# Altium PCB team back ECU.PcbDoc
Units mil, origin at the board's own origin, x right, y up, seen from the top; angles counter-clockwise.
Board outline 2737.01 x 2749.61 mil, 2 copper layers (Top, Bottom); 12 components, 18 nets, 110 pads, 0 vias.
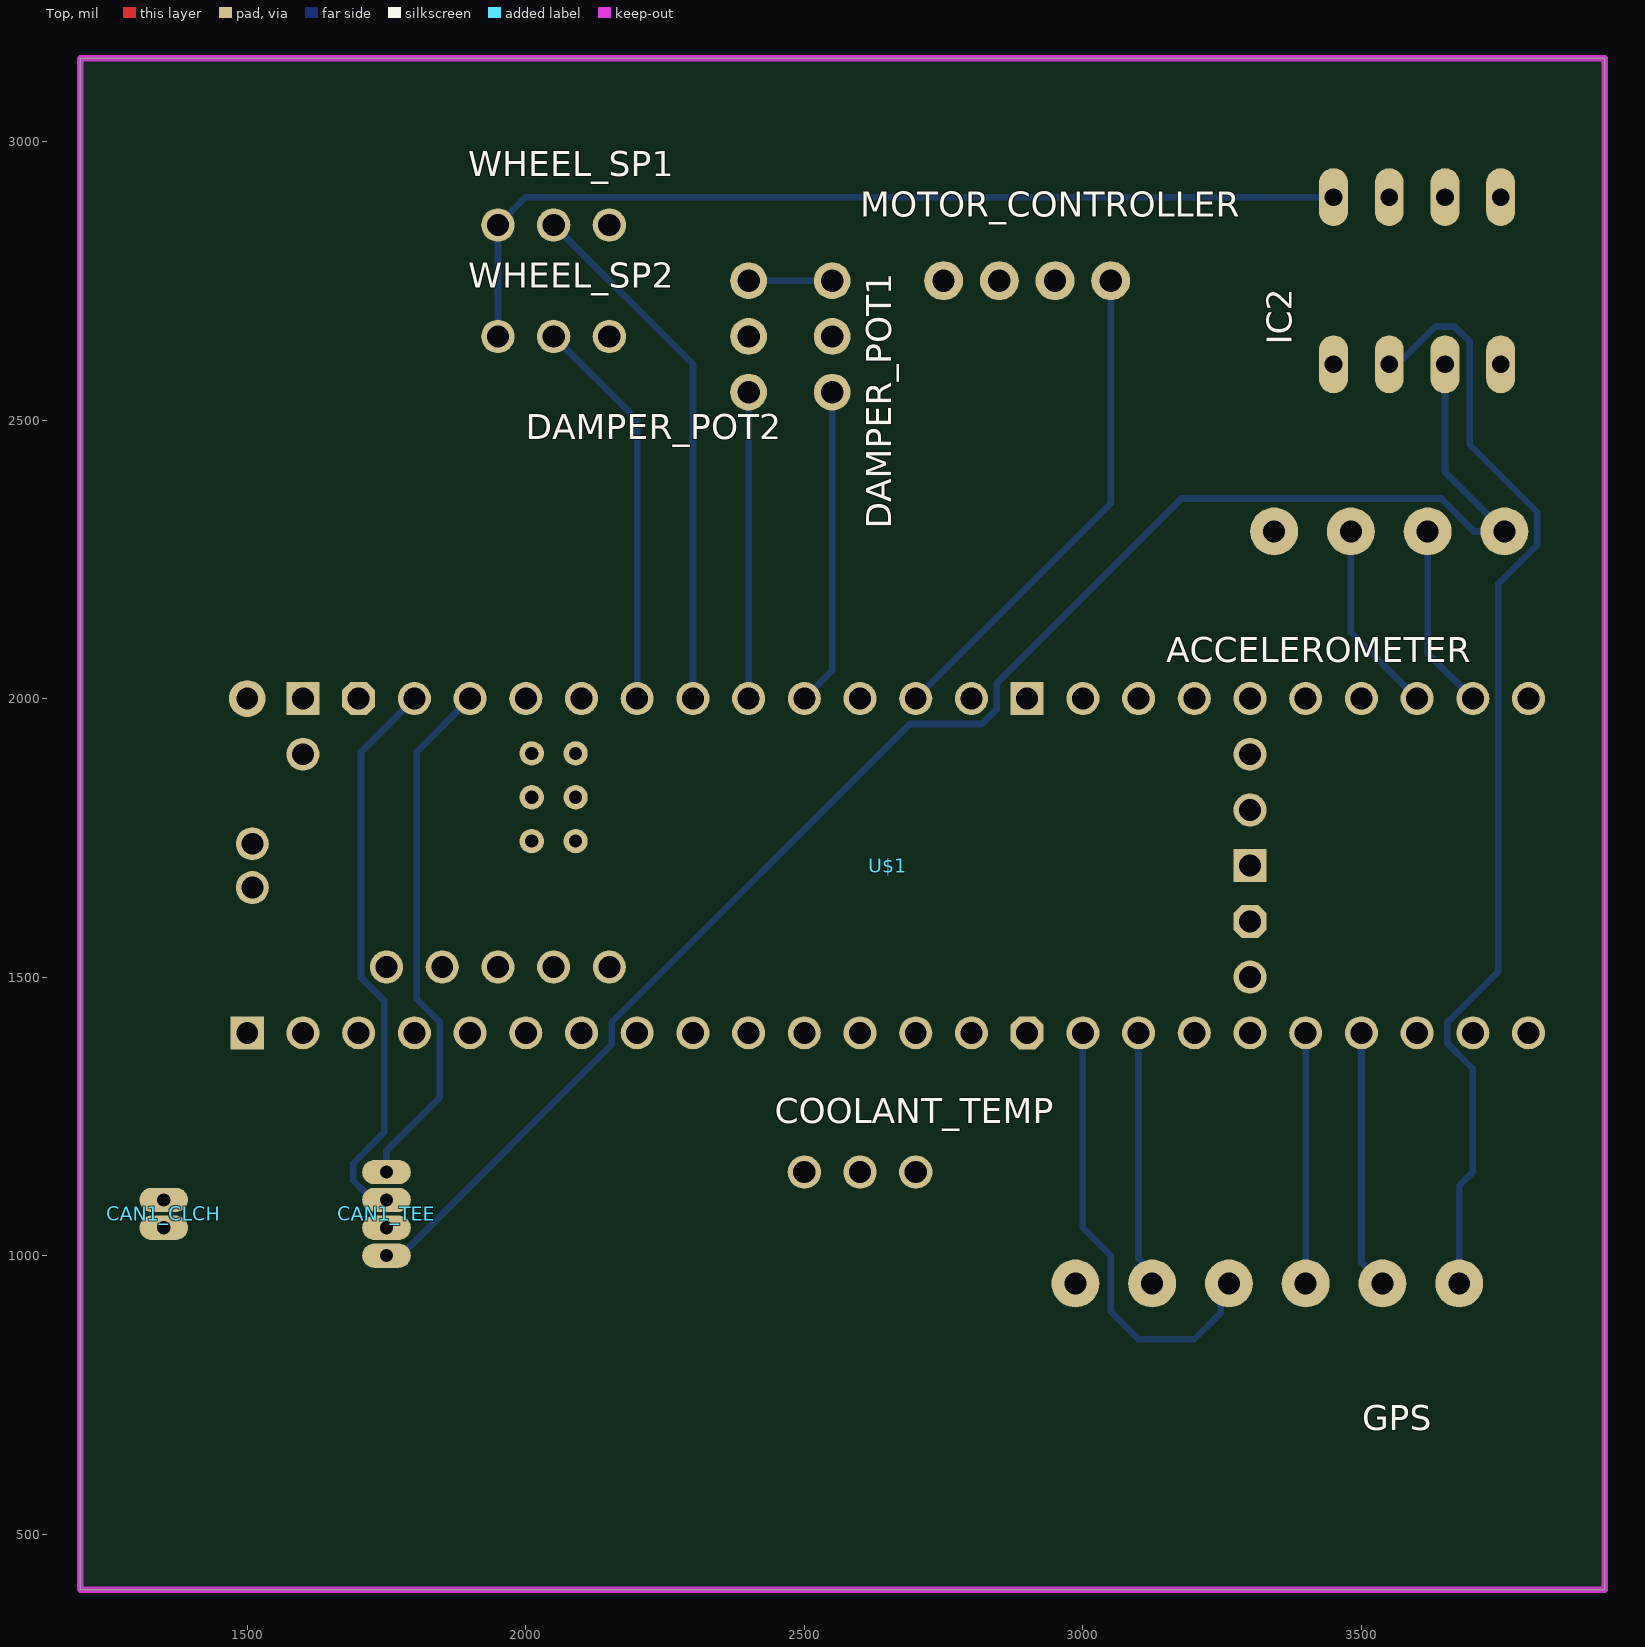
[diagram p0: Top view]
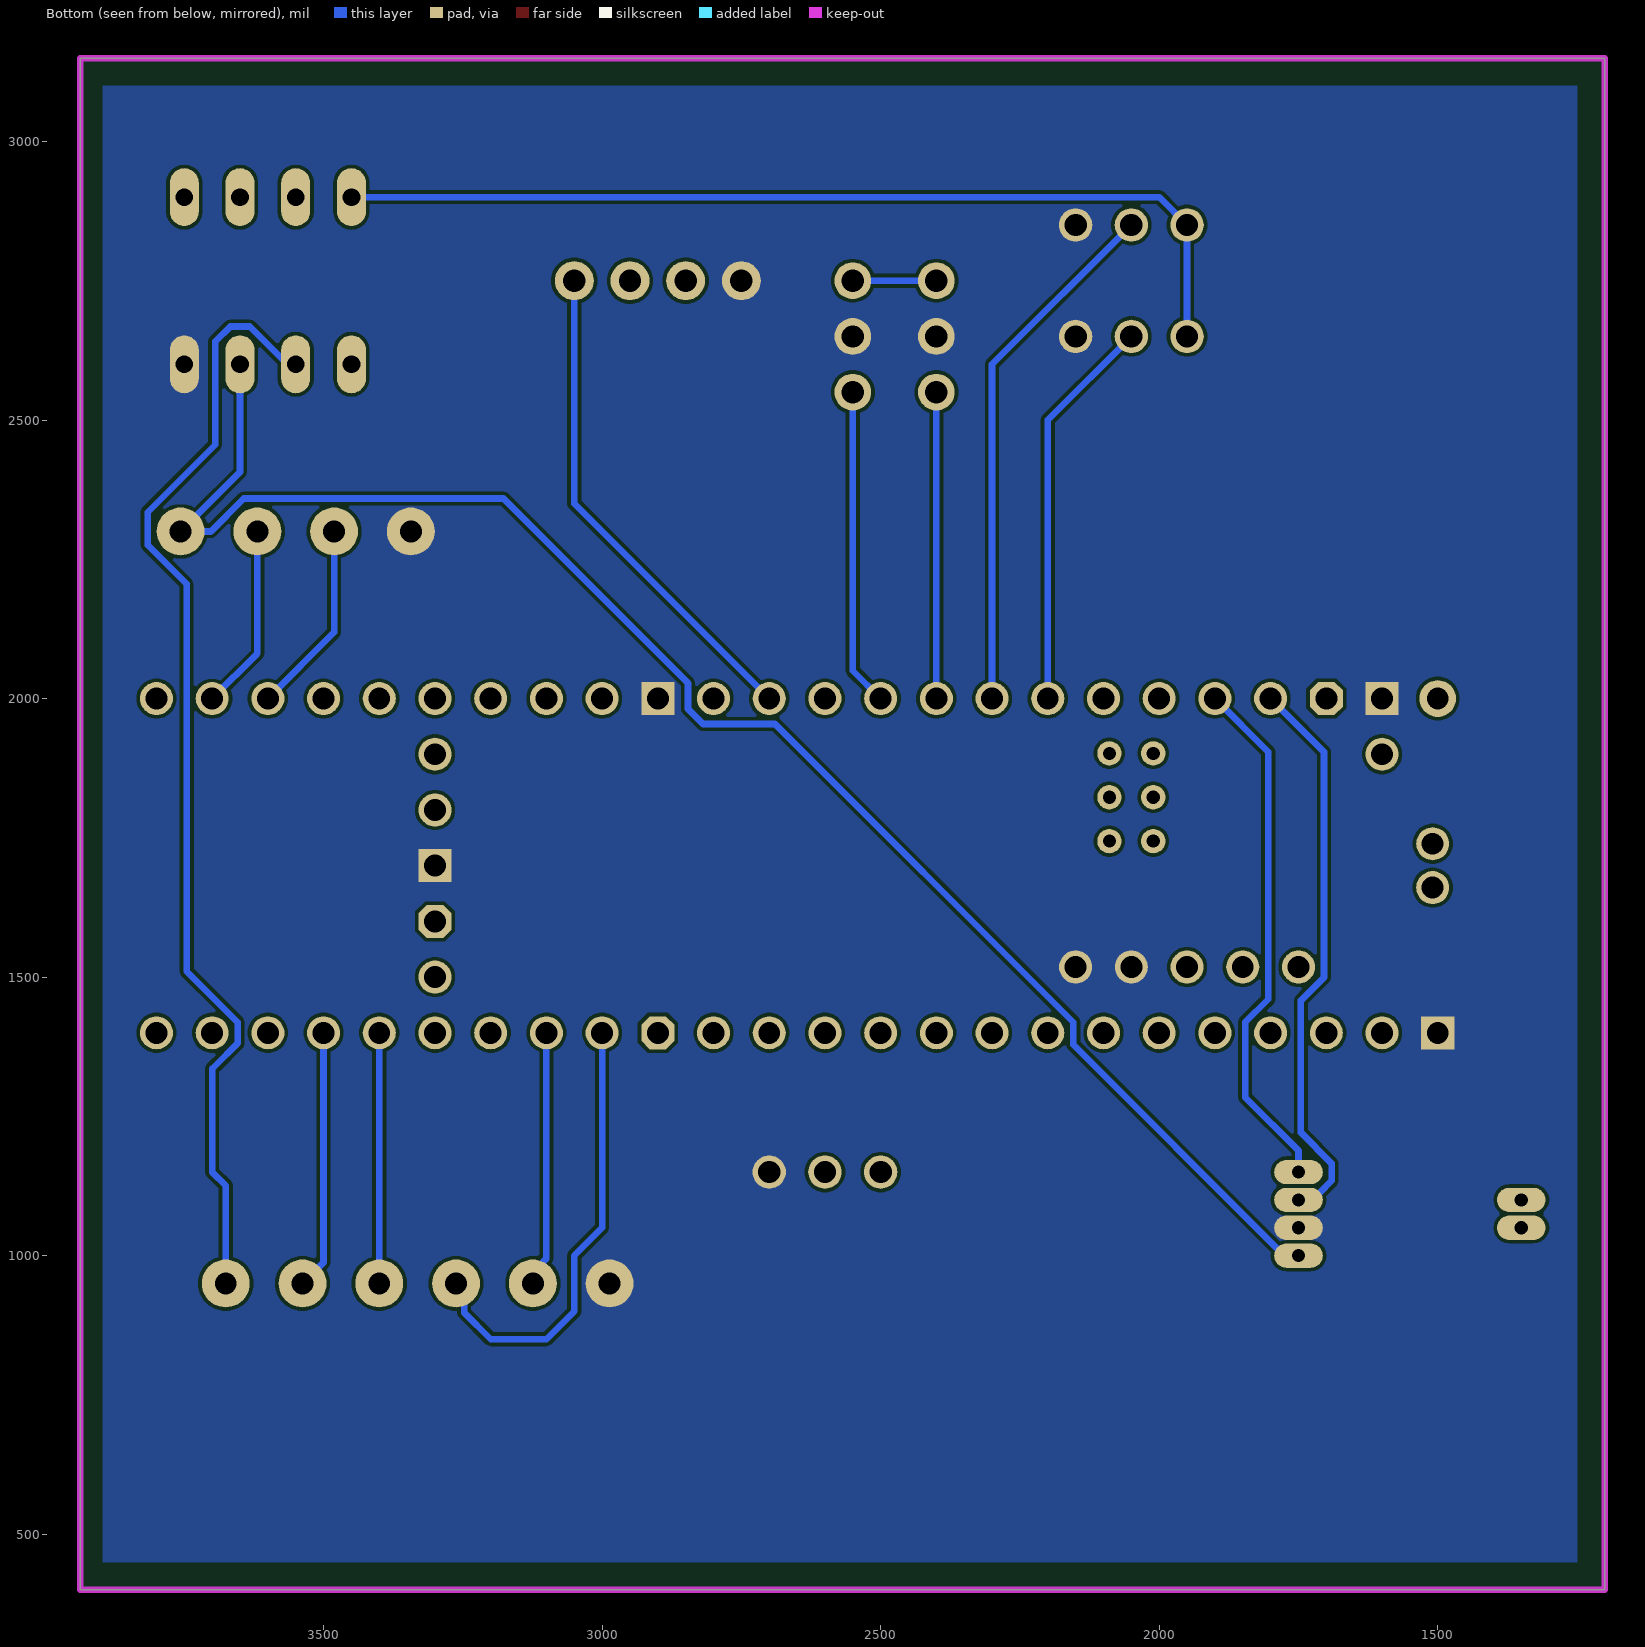
[diagram p1: Bottom view, seen from below]

## Layer stack, top to bottom
Top Solder: solder mask 0.4, Solder Resist, Dk 3.5
Top: signal copper 1.378
Dielectric 1: dielectric 12.6, FR-4, Dk 4.8
Bottom: signal copper 1.378
Bottom Solder: solder mask 0.4, Solder Resist, Dk 3.5

## Board outline
1200,3149.61 1200,400 3937.01,400 3937.01,3149.61

## Design rules (kind name [scope] priority, off if disabled: settings)
BoardOutlineClearance mdCopperDimension [All] p1: gap=10 ignorepadtopadclearanceinfootprint=FALSE except(0: Arc-SplitContinuation Track-SplitContinuation SMDPad-SplitContinuation THPad-SplitContinuation Via-SplitContinuation Fill-SplitContinuation Poly-SplitContinuation Region-SplitContinuation Text-SplitContinuation; 40: Poly-OutlineEdge Poly-CavityEdge Poly-CutoutEdge Poly-SplitBarrior)
Clearance "Clearance (Same Net)" [All] p1: gap=6 ignorepadtopadclearanceinfootprint=FALSE
Clearance [All] p2: gap=6 ignorepadtopadclearanceinfootprint=FALSE
HoleSize [All] p1: absolutevalues=TRUE maxlimit=100000 minlimit=13.78 maxpercent=80.000 minpercent=20.000
HoleToHoleClearance mdDrill [All] p1: gap=6 allowstackedmicrovias=TRUE
MinimumSolderMaskSliver [All] p1 off: minsoldermaskwidth=10
PasteMaskExpansion mlMinCreamFrame [All] p1: expansion=0
PolygonConnect PolygonConnect_For_PolygonThermal_ON_Width120000_Gap100000 [InPolygonClass('PolygonThermal_ON_Width120000_Gap100000') vs Not IsVia] p1: connectstyle=Relief reliefconductorwidth=12 reliefentries=4 polygonreliefangle="90 Angle" airgapwidth=10
PolygonConnect ThermalVias [IsVia] p2: connectstyle=Direct reliefconductorwidth=10 reliefentries=4 polygonreliefangle="90 Angle" airgapwidth=10
PolygonConnect [All] p3: connectstyle=Relief reliefconductorwidth=10 reliefentries=4 polygonreliefangle="90 Angle" airgapwidth=10
RoutingVias [All] p1: holewidth=13.78 width=29.78 viastyle="Through Hole" minholewidth=13.78 minwidth=29.78 maxholewidth=100 maxwidth=100
SolderMaskExpansion mlMinStopFrame [All] p1: expansion=4 istentingtop=FALSE
Width [All] p1: maxlimit=12 minlimit=6 preferedwidth=12 minimp=50.000000 maximp=50.000000 favimp=50.000000
26 further rules are at their usual default settings.

## Components (designator, comment, footprint, x,y, rotation, side; value= is the part's Value field where it differs from the comment)
ACCELEROMETER "" 1X04-3.5MM 3550,2300 r0 top
CAN1_CLCH "" CAN_BUS 1450,900 r90 top
CAN1_TEE "" CAN_TEN 1800,900 r90 top
COOLANT_TEMP "" 1X03 2600,1150 r0 top
DAMPER_POT1 "" 1X03-CLEANBIG 2550,2650 r270 top
DAMPER_POT2 "" 1X03-CLEANBIG 2400,2650 r270 top
GPS "" 1X06-3.5MM 3331.1,950 r0 top
IC2 "ICL7663CPA" DIL08 3600,2750 r0 top
MOTOR_CONTROLLER "1X4-BIG" 1X04-BIG 2750,2750 r0 top
U$1 "" TEENSY41 2700,1700 r0 top
WHEEL_SP1 "" 1X03 2050,2850 r0 top
WHEEL_SP2 "" 1X03 2050,2650 r0 top

## Footprints (in the part's own frame and the unit in brackets; to place one, negate y for a bottom-side part, rotate by r counter-clockwise, add the part's x,y. Pads: shape width x height; smd on the part's side, far side on the other; paste and mask are expansions set on the pad)
1X03 [mil] "1X03"
  round 60 hole 40: 1(-100,0) 2(0,0) 3(100,0)
1X03-CLEANBIG [mil] "1X03-CLEANBIG"
  round 66 hole 40: 1(-100,0) 2(0,0) 3(100,0)
1X04-3.5MM [mil] "1X04-3.5MM"
  round 86 hole 39.37: 1(-206.69,0) 2(-68.9,0) 3(68.9,0) 4(206.69,0)
1X04-BIG [mil] "1X04-BIG"
  round 70 hole 40: 1(0,0) 2(100,0) 3(200,0) 4(300,0)
1X06-3.5MM [mil] "1X06-3.5MM"
  round 86 hole 39.37: 1(-344.49,0) 2(-206.69,0) 3(-68.9,0) 4(68.9,0) 5(206.69,0) 6(344.49,0)
CAN_BUS [mil] "CAN_BUS"
  oval 43.62x87.24 hole 23.62: P$2(150,100) P$3(200,100)
CAN_TEN [mil] "CAN_TEN"
  oval 43.62x87.24 hole 23.62: P$1(100,50) P$2(150,50) P$3(200,50) P$4(250,50)
DIL08 [mil] "DIL08"
  oval 52x104 hole 32: 1(-150,-150) 2(-50,-150) 3(50,-150) 4(150,-150) 5(150,150) 6(50,150) 7(-50,150) 8(-150,150)
TEENSY41 [mm] "TEENSY41"
  round 1.508 hole 1: 0-RX1/CS1/CRX2(-27.94,-7.62) 1-TX1/MISO1/CTX2(-25.4,-7.62) 2-OUT2(-22.86,-7.62) 3-LRCLK2(-20.32,-7.62) 4-BCLK2(-17.78,-7.62) 5-IN2(-15.24,-7.62) 6-OUT1D(-12.7,-7.62) 7-RX2/OUT1A(-10.16,-7.62) 8-TX2/IN2(-7.62,-7.62) 9-OUT1C(-5.08,-7.62) 10-CS\MQSR(-2.54,-7.62) 11-MOSI/CTX1(0,-7.62) 12-MISO/MQSL(2.54,-7.62) 13-SCK/LED(2.54,7.62) 14-A0/TX3/SPDIF_OUT(0,7.62) 15-A1/RX3/SPDIF_IN(-2.54,7.62) 16-A2/RX4/SCL1(-5.08,7.62) 17-A3/TX4/SDA1(-7.62,7.62) 18-A4/SDA0(-10.16,7.62) 19-A5/SCL0(-12.7,7.62) 20-A6/TX5/LRCLK1(-15.24,7.62) 21-A7/RX5/BCLK1(-17.78,7.62) 22-A8/CTX1(-20.32,7.62) 23-A9/CRX1/MCLK1(-22.86,7.62) 24-A10/TX6/SCL2(7.62,-7.62) 25-A11/RX6/SDA2(10.16,-7.62) 26-A12/MOSI1(12.7,-7.62) 27-A13/SCK1(15.24,-7.62) 28-RX7(17.78,-7.62) 29-TX7(20.32,-7.62) 30-CRX3(22.86,-7.62) 31-CTX3(25.4,-7.62) 32-OUT1B(27.94,-7.62) 33-MCLK2(27.94,7.62) 34-RX8(25.4,7.62) 35-TX8(22.86,7.62) 36-PWM(20.32,7.62) 37-PWM(17.78,7.62) 38-A14/CS/IN1(15.24,7.62) 39-A15/CS/OUT1A(12.7,7.62) 40-A16/CS1(10.16,7.62) 41-A17/MISO1(7.62,7.62) +5V(-24.13,-4.62) D+(-30.25,-1) D-(-30.25,1) DM(-21.59,-4.62) DP(-19.05,-4.62) GND4(-16.51,-4.62) GND5(-13.97,-4.62) ON/OFF(15.24,5.08) PROGRAM(15.24,2.54) VBAT(15.24,-5.08) VUSB(-27.94,5.08)
  oct 1.508x1.508 / inner round 1.393 / far side oct 1.508x1.508 hole 1: 3V3-1(5.08,-7.62) 3V3-2(15.24,-2.54) 3V3-3(-25.4,7.62)
  round 1.108 hole 0.6: G(-15.51,3.12) LED(-17.51,3.12) R+(-17.51,5.12) R-(-15.51,5.12) T+(-15.51,1.12) T-(-17.51,1.12)
  rect 1.508x1.508 / inner round 1.393 / far side rect 1.508x1.508 hole 1: GND1(-30.48,-7.62) GND2(15.24,0) GND3(5.08,7.62) GND6(-27.94,7.62)
  round 1.676 hole 1: VIN(-30.48,7.62)

## Part data
ACCELEROMETER: library part 1X04-3.5MM, PackageName=1X04-3.5MM
CAN1_CLCH: library part CAN_BUS, PackageName=CAN_BUS
CAN1_TEE: library part CAN_TEN, PackageName=CAN_TEN
COOLANT_TEMP WHEEL_SP1 WHEEL_SP2: library part 1X03, PackageName=1X03
DAMPER_POT1 DAMPER_POT2: library part 1X03-CLEANBIG, PackageName=1X03-CLEANBIG
GPS: library part 1X06-3.5MM, PackageName=1X06-3.5MM
IC2: library part DIL08, PackageName=DIL08
MOTOR_CONTROLLER: library part 1X04-BIG, PackageName=1X04-BIG
U$1: library part TEENSY41, PackageName=TEENSY41

## Nets (pads, with @x,y where several pads share a name; then routed paths per layer and width w, separated by ;. In a path a pad name is that pad's centre, name@x,y a point inside that pad or via, vN(x,y) a via of type N, cw(c..) or ccw(c..) an arc to the next point about the centre after c; other vN are vias at no path point)
3.3V: ACCELEROMETER.4 CAN1_TEE.P$1 IC2.3 | length 2988.9
  Bottom w12: CAN1_TEE.P$1 1762.19,1012.19 1787.47,1012.19 2154.32,1379.03 2154.32,1418.92 2689.71,1954.32 2818.92,1954.32 2845.69,1981.08 2845.69,2027.68 3177,2359 3643.34,2359 3702.34,2300 ACCELEROMETER.4 3650,2406.69 IC2.3
5V: GPS.6 IC2.2 | length 2020.9
  Bottom w12: IC2.2 3564.6,2600 3632.6,2668 3667.4,2668 3694.49,2640.91 3694.49,2455.51 3815.69,2334.31 3815.69,2275.56 3745.69,2205.55 3745.69,1510.29 3654.32,1418.92 3654.32,1381.08 3694.49,1340.9 3700,1335.39 3700,1150 3675.59,1125.59 GPS.6
12V: IC2.8 WHEEL_SP1.1 WHEEL_SP2.1 | length 1720.7
  Bottom w12: WHEEL_SP2.1 WHEEL_SP1.1 2000,2900 IC2.8
A2: DAMPER_POT1.3 U$1.16-A2/RX4/SCL1 | length 570.7
  Bottom w12: U$1.16-A2/RX4/SCL1 2550,2050 DAMPER_POT1.3
A3: DAMPER_POT2.3 U$1.17-A3/TX4/SDA1 | length 550
  Bottom w12: U$1.17-A3/TX4/SDA1 DAMPER_POT2.3
A_MC: MOTOR_CONTROLLER.4 U$1.14-A0/TX3/SPDIF_OUT | length 895
  Bottom w12: U$1.14-A0/TX3/SPDIF_OUT 3050,2350 MOTOR_CONTROLLER.4
BR_VCC: DAMPER_POT1.1 DAMPER_POT2.1 | length 150
  Bottom w12: DAMPER_POT2.1 DAMPER_POT1.1
GND: ACCELEROMETER.1 CAN1_TEE.P$2 COOLANT_TEMP.3 DAMPER_POT1.2 DAMPER_POT2.2 GPS.1 IC2.4 MOTOR_CONTROLLER.1 U$1.GND1 U$1.GND2 U$1.GND3 U$1.GND4 U$1.GND5 U$1.GND6 WHEEL_SP1.3 WHEEL_SP2.3
N$2: CAN1_TEE.P$3 U$1.23-A9/CRX1/MCLK1 | length 1019.2
  Bottom w12: CAN1_TEE.P$3 1737.81,1112.19 1712.53,1112.19 1690.38,1134.34 1690.38,1165.66 1745.69,1220.97 1745.69,1457.82 1704.32,1499.19 1704.32,1904.32 U$1.23-A9/CRX1/MCLK1
N$3: CAN1_TEE.P$4 U$1.22-A8/CTX1 | length 946.4
  Bottom w12: CAN1_TEE.P$4 1750,1188.51 1845.69,1284.2 1845.69,1418.92 1804.32,1460.29 1804.32,1904.32 U$1.22-A8/CTX1
RX: ACCELEROMETER.2 U$1.35-TX8 | length 349.2
  Bottom w12: ACCELEROMETER.2 3481.1,2118.9 U$1.35-TX8
RX_2: GPS.5 U$1.29-TX7 | length 465.7
  Bottom w12: U$1.29-TX7 3500,987.79 GPS.5
SCL: GPS.3 U$1.24-A10/TX6/SCL2 | length 817.2
  Bottom w12: U$1.24-A10/TX6/SCL2 3000,1050 3050,1000 3050,900 3100,850 3200,850 3247.66,897.66 3247.66,935.46 GPS.3
SDA: GPS.2 U$1.25-A11/RX6/SDA2 | length 460.1
  Bottom w12: U$1.25-A11/RX6/SDA2 3100,994.98 3124.41,970.57 GPS.2
TX: ACCELEROMETER.3 U$1.34-RX8 | length 333.6
  Bottom w12: ACCELEROMETER.3 3618.9,2081.1 U$1.34-RX8
TX_2: GPS.4 U$1.28-RX7 | length 450
  Bottom w12: GPS.4 U$1.28-RX7
WH_SP1_D: U$1.18-A4/SDA0 WHEEL_SP1.2 | length 953.6
  Bottom w12: WHEEL_SP1.2 2300,2600 U$1.18-A4/SDA0
WH_SP2_D: U$1.19-A5/SCL0 WHEEL_SP2.2 | length 712.1
  Bottom w12: WHEEL_SP2.2 2200,2500 U$1.19-A5/SCL0
pads on no net: CAN1_CLCH.P$2 CAN1_CLCH.P$3 COOLANT_TEMP.1 COOLANT_TEMP.2 IC2.1 IC2.5 IC2.6 IC2.7 MOTOR_CONTROLLER.2 MOTOR_CONTROLLER.3 U$1.0-RX1/CS1/CRX2 U$1.1-TX1/MISO1/CTX2 U$1.2-OUT2 U$1.3-LRCLK2 U$1.3V3-1 U$1.3V3-2 U$1.3V3-3 U$1.4-BCLK2 U$1.5-IN2 U$1.6-OUT1D U$1.7-RX2/OUT1A U$1.8-TX2/IN2 U$1.9-OUT1C U$1.10-CS\MQSR U$1.11-MOSI/CTX1 U$1.12-MISO/MQSL U$1.13-SCK/LED U$1.15-A1/RX3/SPDIF_IN U$1.20-A6/TX5/LRCLK1 U$1.21-A7/RX5/BCLK1 U$1.26-A12/MOSI1 U$1.27-A13/SCK1 U$1.30-CRX3 U$1.31-CTX3 U$1.32-OUT1B U$1.33-MCLK2 U$1.36-PWM U$1.37-PWM U$1.38-A14/CS/IN1 U$1.39-A15/CS/OUT1A U$1.40-A16/CS1 U$1.41-A17/MISO1 U$1.+5V U$1.D+ U$1.D- U$1.DM U$1.DP U$1.G U$1.LED U$1.ON/OFF U$1.PROGRAM U$1.R+ U$1.R- U$1.T+ U$1.T- U$1.VBAT U$1.VIN U$1.VUSB

## Polygon pours and split planes (outlines as drawn)
GND on Bottom "GND_L02_P000" (solid, pour order 0): 3900,450 3900,3100 1250,3100 1250,450

## Keep-outs
Keep-Out Layer:
  the board outline again, w12

## Silkscreen, mask and mechanical layers (free items; w line width, h text height)
Dimension:
  lines w12: 1200,400 1200,3149.61 3937.01,3149.61 3937.01,400 3252.76,400 1884.25,400 1200,400

## Text inside footprints (layer, text, board x,y; h text height)
U$1: tPlace "POGO" at 1570.78,1653.76 h37.2 r90; tPlace "COIN CEL" at 3110,1483 h37.2; tPlace "3 VOLT" at 3145,1510 h37.2; tPlace "USB" at 1609.89,1655.74 h49.6 r90; tPlace "TEENSY 4.1" at 2400,1700 h77.5